# Altium PCB PCB1.PcbDoc
Units mm, origin at the board's own origin, x right, y up, seen from the top; angles counter-clockwise.
Board outline 80.01 x 85.09 mm, 2 copper layers (Top Layer, Bottom Layer); 21 components, 20 nets, 59 pads, 0 vias.
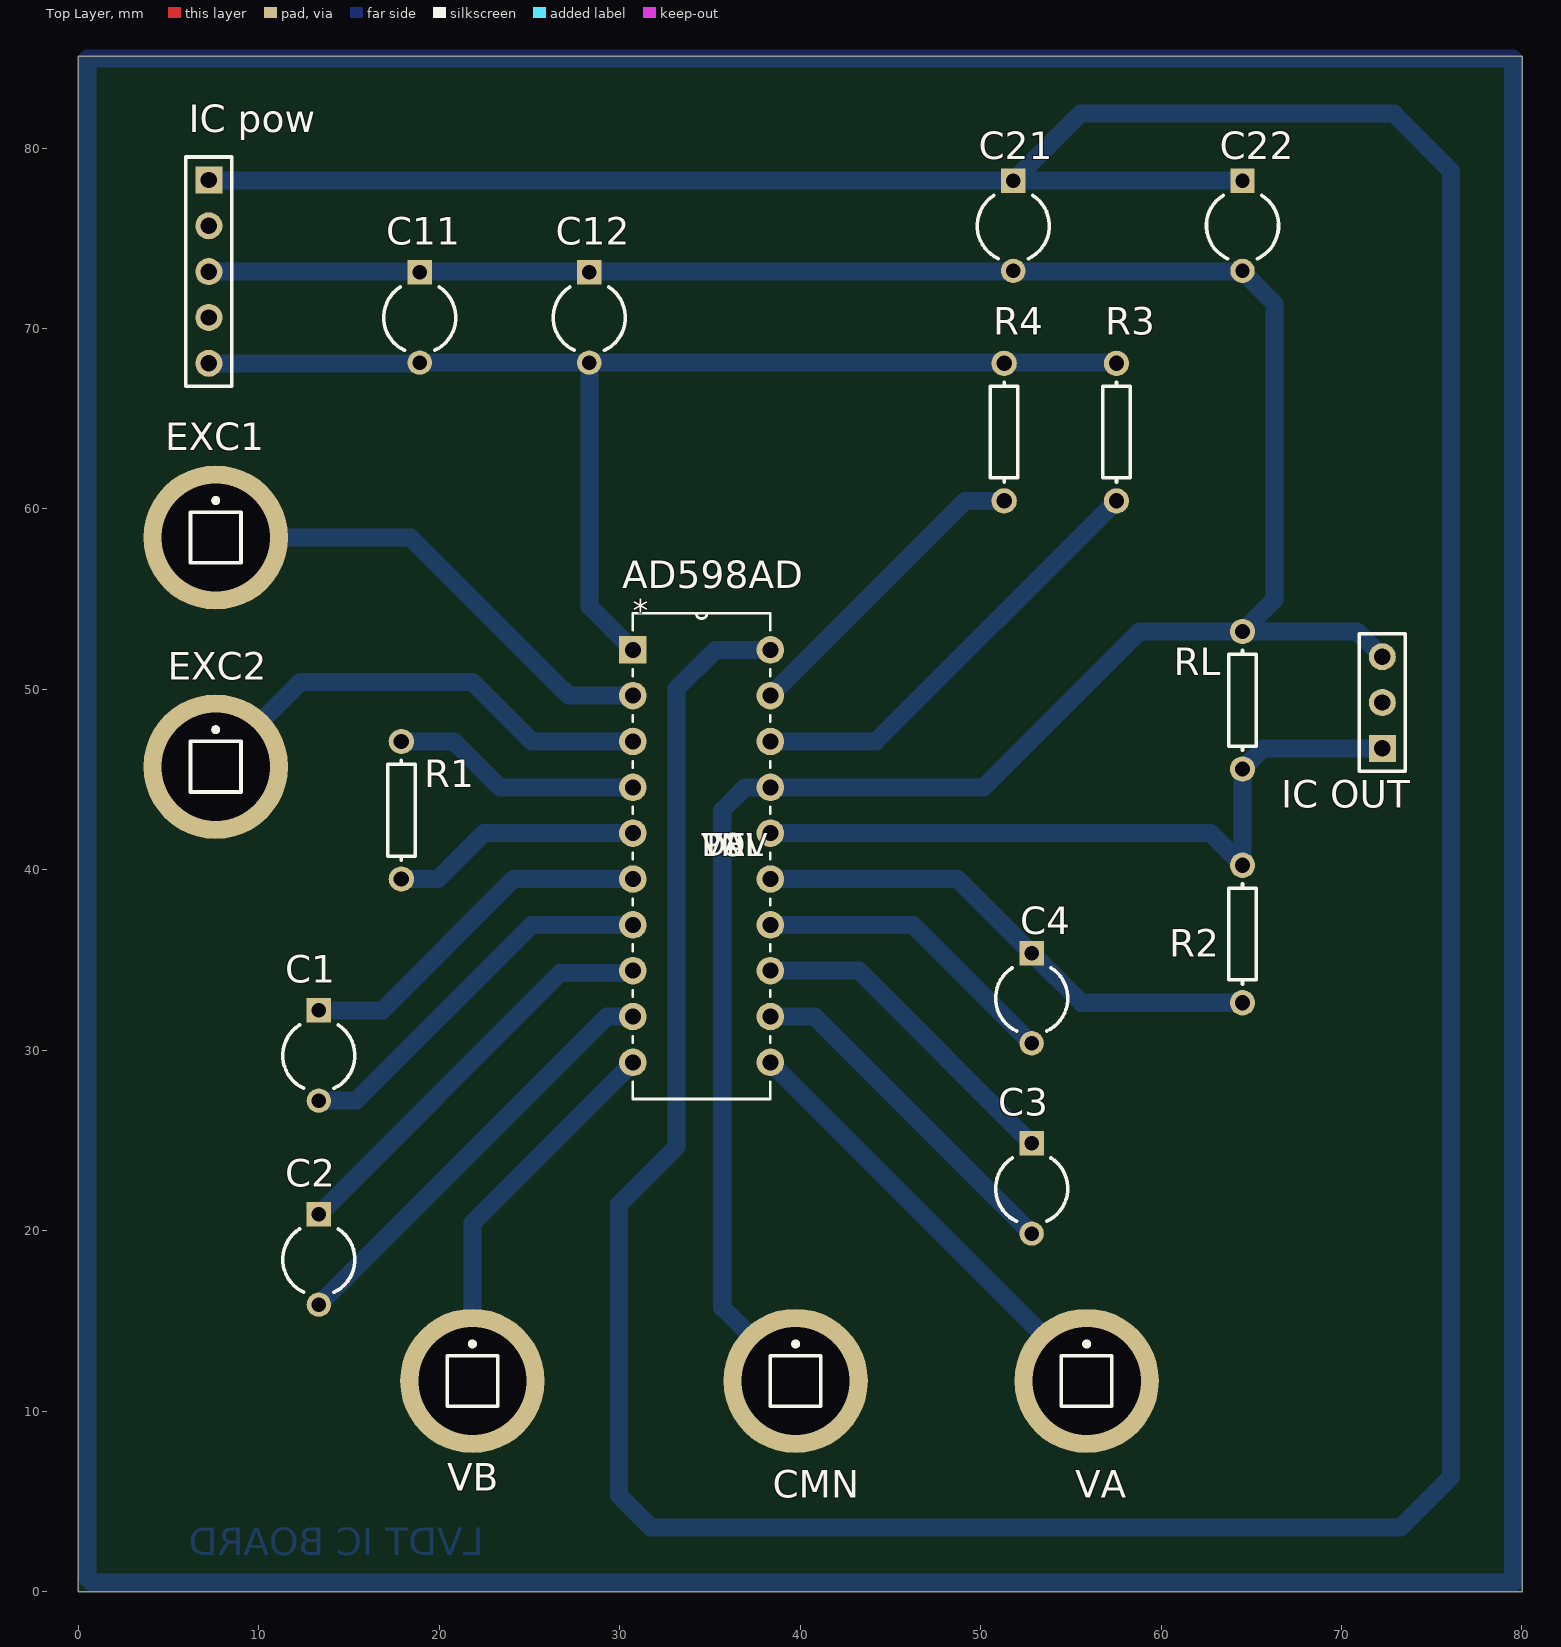
[diagram p0: Top Layer view]
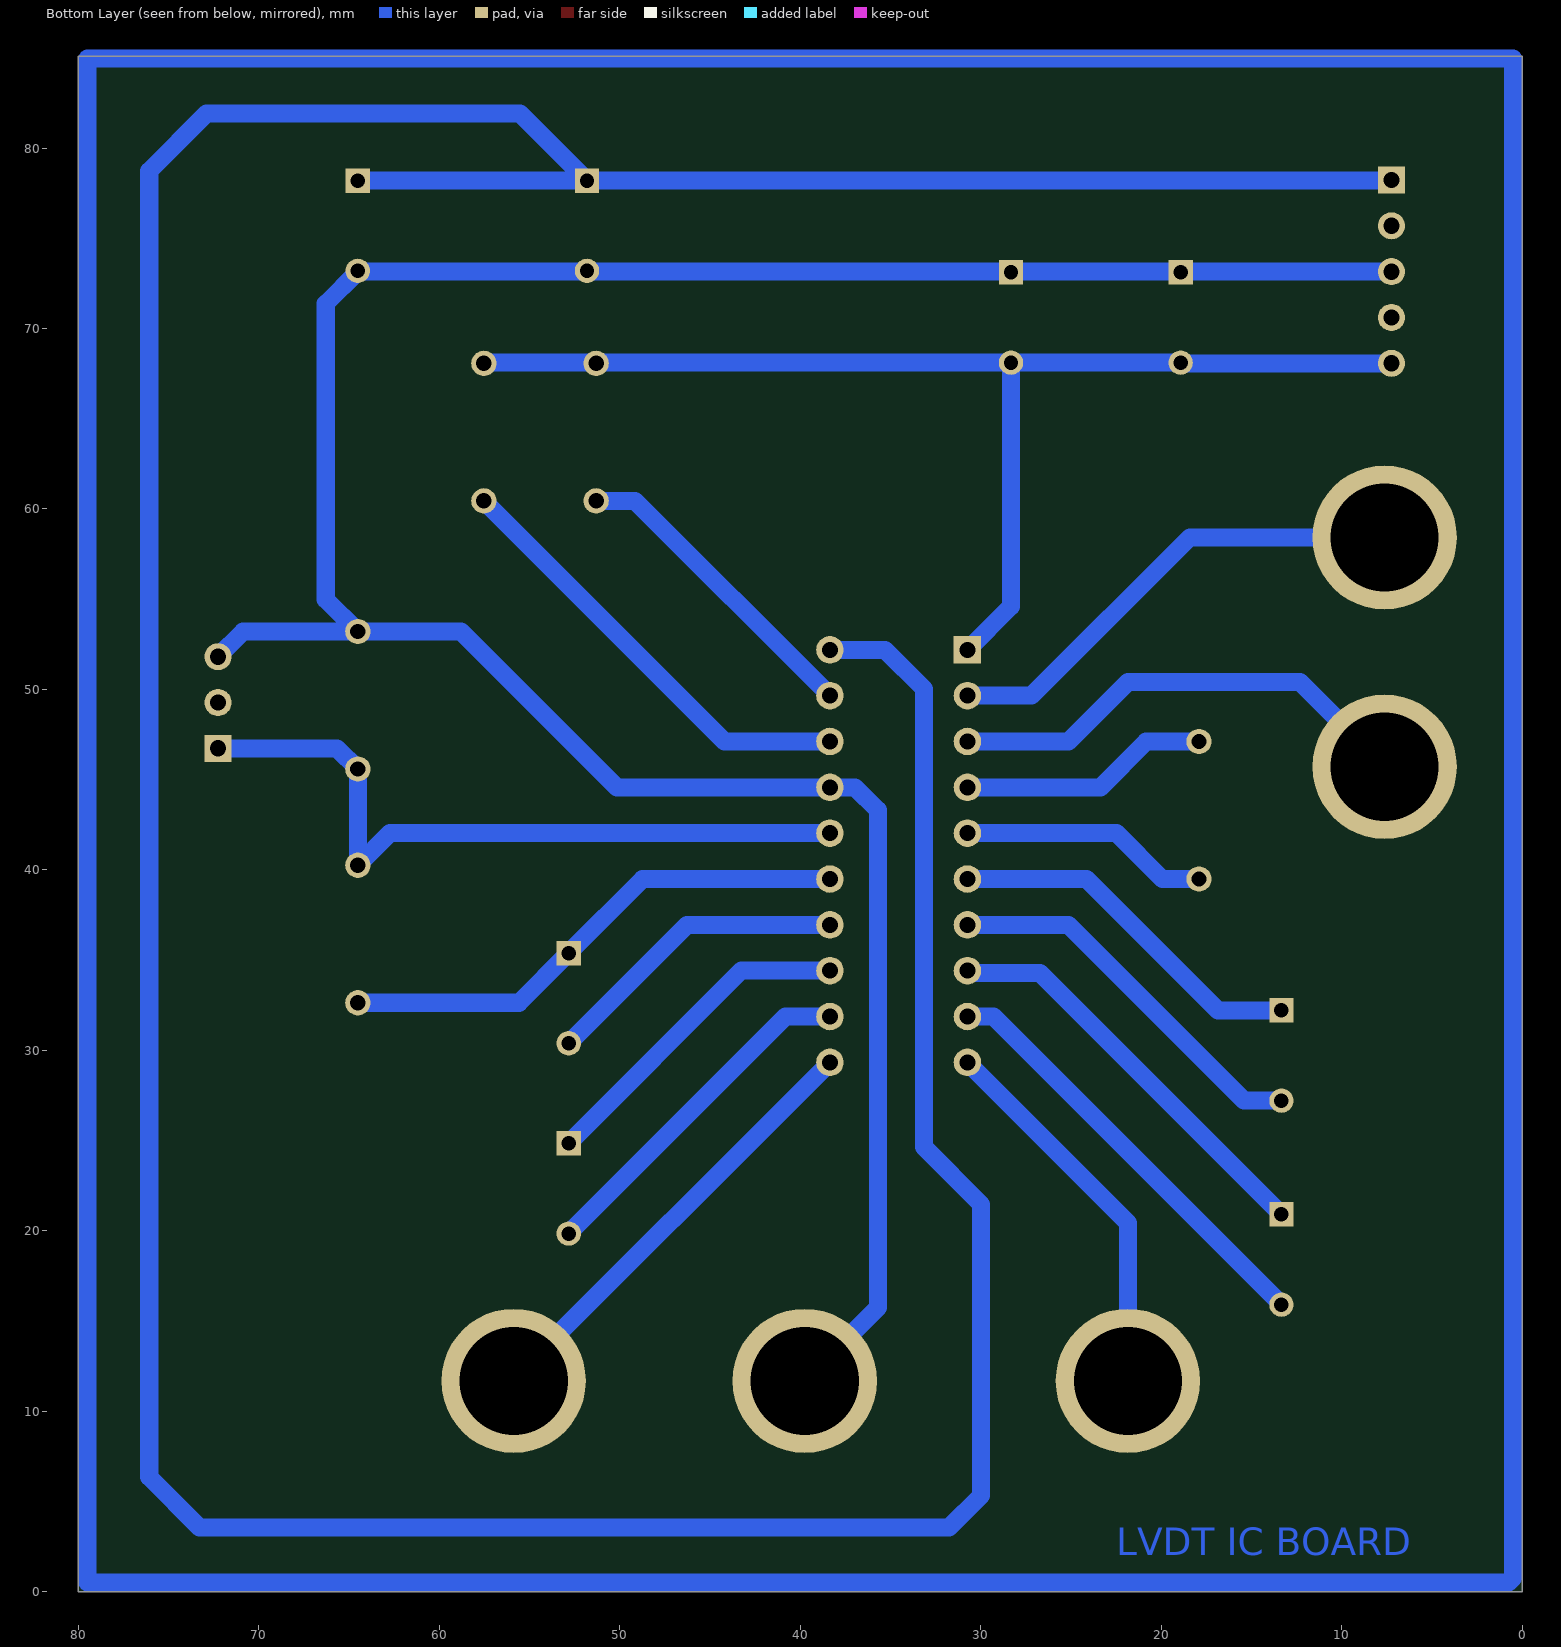
[diagram p1: Bottom Layer view, seen from below]

## Layer stack, top to bottom
Top Layer: signal copper 0.0356
Dielectric: dielectric 0.32, FR-4, Dk 4.8
Bottom Layer: signal copper 0.0356

## Board outline
0,0 0,85.09 80.01,85.09 80.01,0 0,0

## Design rules (kind name [scope] priority, off if disabled: settings)
Clearance [All] p1: gap=0.5
PolygonConnect [All] p1: connectstyle=Relief reliefconductorwidth=0.254 reliefentries=4 polygonreliefangle="90 Angle"
RoutingCorners [All] p1: cornerstyle=45-Degree minsetback=1 maxsetback=1
RoutingLayers [All] p1: top layer_v5=FALSE bottom layer_v5=TRUE
RoutingVias [All] p1: holewidth=0.711 width=1.27 viastyle="Through Hole" minholewidth=0.711 minwidth=1.27 maxholewidth=0.711 maxwidth=1.27
SilkscreenOverComponentPads [All] p1: minsilkscreentomaskgap=0.254
SolderMaskExpansion [All] p1: expansion=0.102
Width [All] p1: maxlimit=1 minlimit=1 preferedwidth=1
25 further rules are at their usual default settings.

## Components (designator, comment, footprint, x,y, rotation, side; value= is the part's Value field where it differs from the comment)
AD598AD "AD598AD" D_20 38.354,29.337 r0 top
C1 "Cap2" CAPR5-4X5 13.335,29.718 r270 top
C2 "Cap2" CAPR5-4X5 13.335,18.415 r270 top
C3 "Cap2" CAPR5-4X5 52.832,22.352 r270 top
C4 "Cap2" CAPR5-4X5 52.832,32.893 r270 top
C11 "Cap2" CAPR5-4X5 18.923,70.612 r270 top
C12 "Cap2" CAPR5-4X5 28.321,70.612 r270 top
C21 "Cap2" CAPR5-4X5 51.816,75.692 r270 top
C22 "Cap2" CAPR5-4X5 64.516,75.692 r270 top
CMN "Socket" PIN1 39.751,11.684 r0 top
EXC1 "Socket" PIN1 7.62,58.42 r0 top
EXC2 "Socket" PIN1 7.62,45.72 r0 top
"IC OUT" "Header 3" HDR1X3 72.263,46.736 r90 top
"IC pow" "Header 5" HDR1X5 7.239,78.232 r270 top
R1 "R1" AXIAL-0.3 17.907,43.307 r270 top
R2 "Res1" AXIAL-0.3 64.516,36.449 r90 top
R3 "Res1" AXIAL-0.3 57.531,64.262 r90 top
R4 "Res1" AXIAL-0.3 51.308,64.262 r90 top
RL "Res1" AXIAL-0.3 64.516,49.403 r90 top
VA "Socket" PIN1 55.88,11.684 r0 top
VB "Socket" PIN1 21.844,11.684 r0 top

## Footprints (in the part's own frame and the unit in brackets; to place one, negate y for a bottom-side part, rotate by r counter-clockwise, add the part's x,y. Pads: shape width x height; smd on the part's side, far side on the other; paste and mask are expansions set on the pad)
AXIAL-0.3 [mm] "Axial Device, Thru-Hole; 2 Leads; 0.3 in Pin Spacing"
  round 1.4 hole 0.85: 1(-3.81,0) 2(3.81,0)
  silkscreen extent -2.77,-0.76 2.77,0.76
CAPR5-4X5 [mm] "Capacitor; 2 Leads"
  rect 1.35x1.35 hole 0.8: 1(-2.5,0)
  round 1.35 hole 0.8: 2(2.5,0)
  silkscreen extent -1.69,-2 1.82,2
D_20 [mil]
  rect 60x60 / inner round 60 / far side rect 60x60 hole 35: 1(-300,900)
  round 60 hole 35: 2(-300,800) 3(-300,700) 4(-300,600) 5(-300,500) 6(-300,400) 7(-300,300) 8(-300,200) 9(-300,100) 10(-300,0) 11(0,0) 12(0,100) 13(0,200) 14(0,300) 15(0,400) 16(0,500) 17(0,600) 18(0,700) 19(0,800) 20(0,900)
  silkscreen extent -300,-80 0,980
HDR1X3 [mm] "Connector; Header; 3 Position"
  rect 1.5x1.5 hole 0.9: 1(0,0)
  round 1.5 hole 0.9: 2(2.54,0) 3(5.08,0)
  silkscreen extent -1.27,-1.27 6.35,1.27
HDR1X5 [mm] "Connector; Header; 5 Position"
  rect 1.5x1.5 hole 0.9: 1(0,0)
  round 1.5 hole 0.9: 2(2.54,0) 3(5.08,0) 4(7.62,0) 5(10.16,0)
  silkscreen extent -1.27,-1.27 11.43,1.27
PIN1 [mm] "Connector; Plug"
  round 8 hole 6: 1(0,0)
  silkscreen extent -1.4,-1.4 1.4,2.17

## Part data
AD598AD: "Imported"
C1 C2 C3 C4 C11 C12 C21 C22: "Capacitor"
"IC OUT": "Header, 3-Pin"
"IC pow": "Header, 5-Pin"
R1: library part Res1, "Resistor"
R2 R3 R4 RL: "Resistor"

## Nets (pads, with @x,y where several pads share a name; then routed paths per layer and width w, separated by ;. In a path a pad name is that pad's centre, name@x,y a point inside that pad or via, vN(x,y) a via of type N, cw(c..) or ccw(c..) an arc to the next point about the centre after c; other vN are vias at no path point)
NetAD598AD_1: "IC pow.5" AD598AD.1 C11.2 C12.2 R3.2 R4.2 | length 67.2
  Bottom Layer w1: 7.239,68.072 18.883,68.072 C11.2 C12.2 ; AD598AD.1 28.321,54.61 C12.2 ; R3.2@57.491,68.112 C12.2
NetAD598AD_2: AD598AD.2 EXC1.1 | length 26.7
  Bottom Layer w1: EXC1.1 18.415,58.42 27.178,49.657 AD598AD.2
NetAD598AD_3: AD598AD.3 EXC2.1 | length 26.6
  Bottom Layer w1: EXC2.1@6.223,45.339 EXC2.1@6.35,45.212 ; EXC2.1 12.319,50.419 21.844,50.419 25.146,47.117 AD598AD.3
NetAD598AD_4: AD598AD.4 R1.1 | length 13.9
  Bottom Layer w1: R1.1 20.828,47.117 23.368,44.577 AD598AD.4
NetAD598AD_5: AD598AD.5 R1.2 | length 13.9
  Bottom Layer w1: R1.2 19.939,39.497 22.479,42.037 AD598AD.5
NetAD598AD_6: AD598AD.6 C1.1 | length 20.4
  Bottom Layer w1: C1.1 16.851,32.218 24.13,39.497 AD598AD.6
NetAD598AD_7: AD598AD.7 C1.2 | length 21.4
  Bottom Layer w1: C1.2 15.407,27.218 25.146,36.957 AD598AD.7
NetAD598AD_8: AD598AD.8 C2.1 | length 22.8
  Bottom Layer w1: C2.1 26.71,34.29 AD598AD.8@30.607,34.29
NetAD598AD_9: AD598AD.9 C2.2 | length 24
  Bottom Layer w1: C2.2 29.297,31.877 AD598AD.9
NetAD598AD_10: AD598AD.10 VB.1 | length 21.3
  Bottom Layer w1: VB.1 21.844,20.447 AD598AD.10
NetAD598AD_11: AD598AD.11 VA.1 | length 25
  Bottom Layer w1: AD598AD.11@38.481,29.337 AD598AD.11 55.88,11.811 VA.1
NetAD598AD_12: AD598AD.12 C3.2 | length 19.5
  Bottom Layer w1: AD598AD.12 40.807,31.877 C3.2
NetAD598AD_13: AD598AD.13 C3.1 | length 18.4
  Bottom Layer w1: AD598AD.13 43.267,34.417 C3.1
NetAD598AD_14: AD598AD.14 C4.2 | length 17.2
  Bottom Layer w1: AD598AD.14 46.268,36.957 C4.2
NetAD598AD_15: AD598AD.15 C4.1 R2.1 | length 29
  Bottom Layer w1: AD598AD.15 48.728,39.497 C4.1 55.586,32.639 R2.1
NetAD598AD_16: "IC OUT.1" AD598AD.16 R2.2 RL.1 | length 40.5
  Bottom Layer w1: AD598AD.16 62.738,42.037 R2.2 RL.1 65.659,46.736 72.263,46.736
NetAD598AD_17: "IC OUT.3" "IC pow.3" AD598AD.17 C11.1 C12.1 C21.2 C22.2 CMN.1 RL.2 | length 153.3
  Bottom Layer w1: 7.239,73.152 64.516,73.152 66.294,71.374 66.294,54.991 RL.2 ; CMN.1 35.687,15.748 35.687,43.307 36.957,44.577 AD598AD.17 50.165,44.577 58.801,53.213 RL.2 ; 72.263,51.816 70.866,53.213 RL.2
NetAD598AD_18: AD598AD.18 R3.1 | length 24.7
  Bottom Layer w1: AD598AD.18 44.196,47.117 R3.1
NetAD598AD_19: AD598AD.19 R4.1 | length 17.4
  Bottom Layer w1: AD598AD.19 49.149,60.452 R4.1
NetAD598AD_20: "IC pow.1" AD598AD.20 C21.1 C22.1 | length 256.9
  Bottom Layer w1: 7.239,78.232 7.279,78.192 C21.1 ; AD598AD.20 35.306,52.197 33.147,50.038 33.147,24.638 29.972,21.463 29.972,5.334 31.75,3.556 73.279,3.556 76.073,6.35 76.073,78.74 72.898,81.915 55.539,81.915 C21.1 ; C22.1 C21.1
pads on no net: "IC OUT.2" "IC pow.2" "IC pow.4"
copper on no net: | length 326.7
  Bottom Layer w1: 0.508,0.762 0.508,84.963 79.502,84.963 79.502,0.508 0.762,0.508 0.508,0.762

## Other copper
Bottom Layer:
  text "LVDT IC BOARD" at 22.479,2.032 h1.52

## Text inside footprints (layer, text, board x,y; h text height)
AD598AD: Top Overlay "TOL" at 34.544,40.767 h1.27; Top Overlay "VAL" at 34.544,40.767 h1.27; Top Overlay "DEV" at 34.544,40.767 h1.27; Top Overlay "PN" at 34.544,40.767 h1.27; Top Overlay "*" at 30.734,53.721 h1.27; Mechanical 1 "RefDes2" at 34.544,40.767 h1.27; Mechanical 1 "*" at 30.734,53.721 h1.27